# Altium PCB lvSdbPcb.PcbDoc (part 2 of 2)
Units mm, origin at the board's own origin, x right, y up, seen from the top; angles counter-clockwise.
Board outline 45 x 70 mm, 2 copper layers (Top Layer, Bottom Layer); 60 components, 41 nets, 179 pads, 30 vias.
Unrouted connection lines stored in the file: 1.
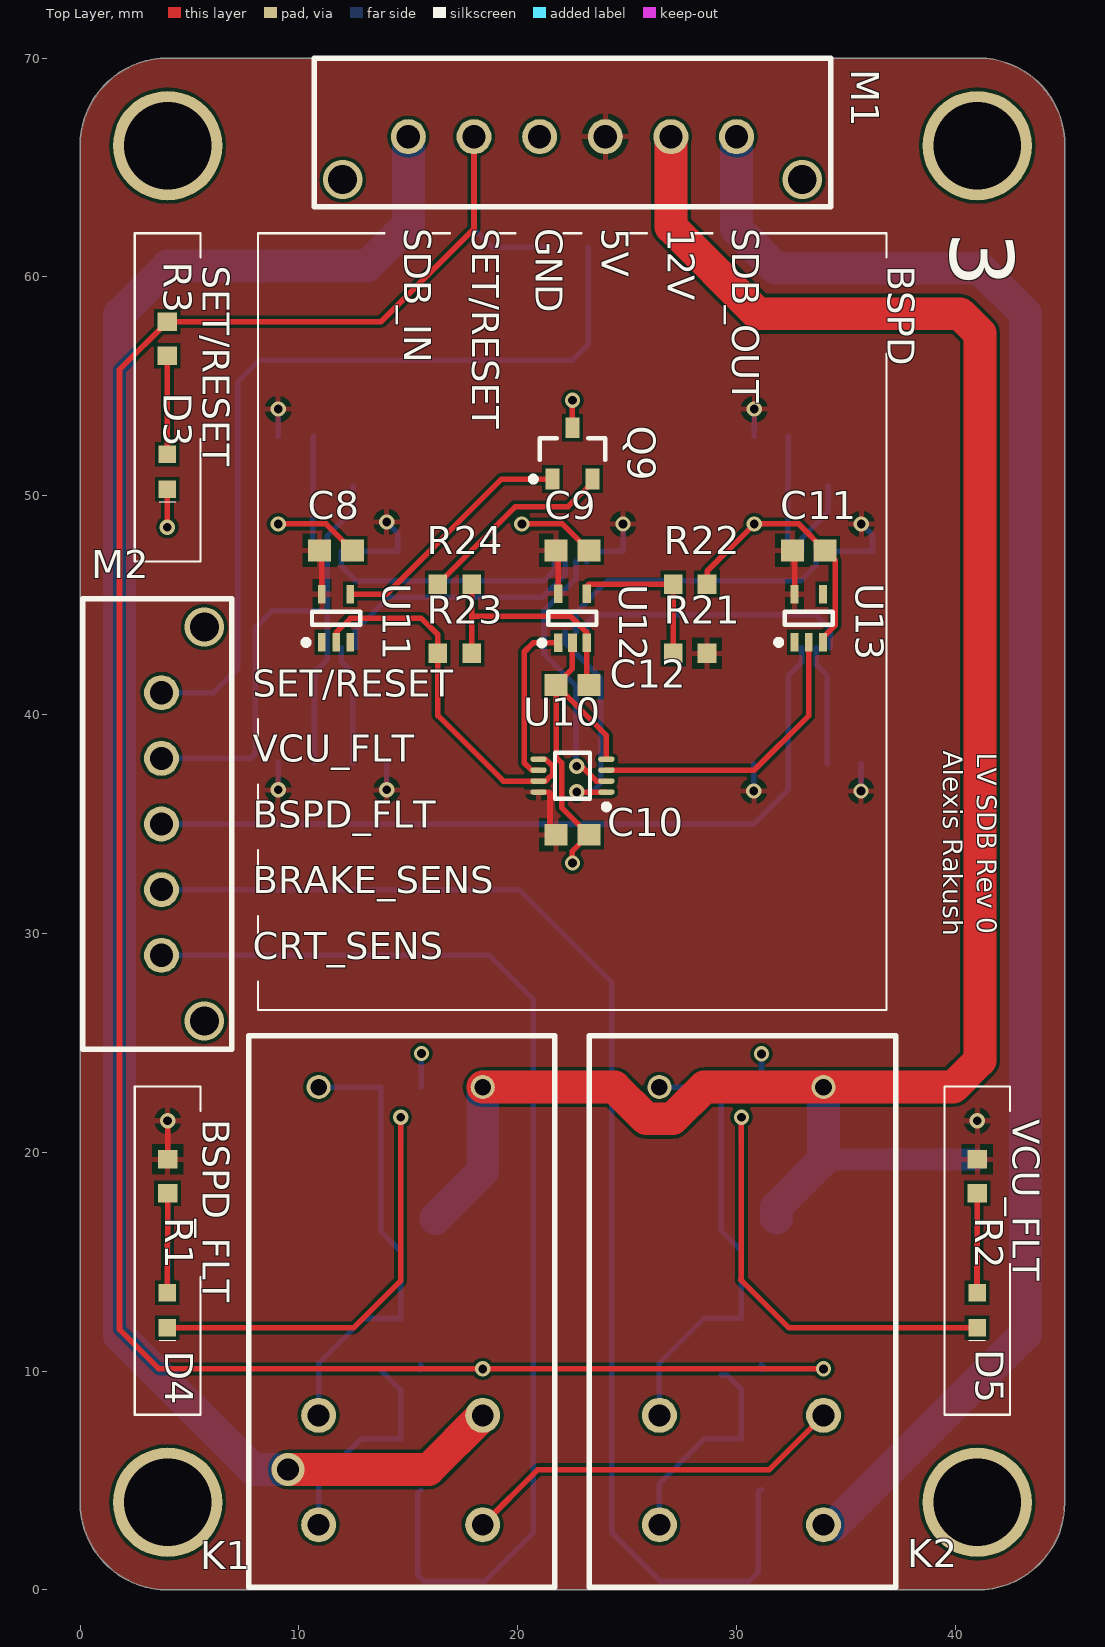
[diagram p0: Top Layer view]

## Via types
v1: diameter 0.7, hole 0.4, Top Layer to Bottom Layer, 25 vias
v2: diameter 1.8, hole 1.32, Top Layer to Bottom Layer, 4 vias
v3: diameter 1.5, hole 1, Top Layer to Bottom Layer, 1 vias

## Nets (pads, with @x,y where several pads share a name; then routed paths per layer and width w, separated by ;. In a path a pad name is that pad's centre, name@x,y a point inside that pad or via, vN(x,y) a via of type N, cw(c..) or ccw(c..) an arc to the next point about the centre after c; other vN are vias at no path point) (continued)
NetU9_2: (continued)
  Bottom Layer w0.254: U9.2 22.661,44.671 24.111,46.121 32.946,46.121 33.636,46.811 U14.7
NetU9_3: U9.3 U10.1 | length 10.2
  Top Layer w0.254: v1@22.8,36.461 U10.1
  Bottom Layer w0.254: U9.3 22.161,43.289 23.8,41.65 23.8,36.871 23.396,36.467 v1@22.6,36.467
  other v1: 22.7,36.467
NetU9_7: U9.7 U10.2 | length 12.2
  Top Layer w0.254: v1@22.661,37.64 v1(22.7,37.64) 22.91,37.64 23.589,36.961 U10.2
  Bottom Layer w0.254: v1@22.661,37.64 22.661,41.309 21.2,42.769 21.2,44.761 22.661,46.222 U9.7
NetU10_3: U10.3 U13.2 | length 13.6
  Top Layer w0.254: U10.3 30.807,37.461 33.3,39.954 U13.2
NetU10_6: U10.6 U12.1 | length 7.6
  Top Layer w0.254: U10.6 20.631,37.461 20.298,37.794 20.298,42.873 20.7,43.275 U12.1
NetU13_4: U13.4
SDB_IN: K1.5 M1.1 | length 85.8
  Top Layer w1.5: v3(9.5,5.5) 15.923,5.5 K1.5
  Bottom Layer w1.5: v3(9.5,5.5) 7.918,5.5 1.8,11.618 1.8,11.975 1.8,58.3 4,60.5 13.114,60.5 15,62.386 M1.1
SDB_OUT: K2.4 M1.6 | length 78.5
  Bottom Layer w1.5: M1.6 30,62.186 31.786,60.4 41.118,60.4 43.2,58.318 43.2,11.7 34.477,2.977 K2.4
SET/RESET: M1.2 Q4.1 Q5.1 R3.1 R9.2 | length 114
  Top Layer w0.254: M1.2 18,62.2 13.75,57.95 R3.1 1.8,55.762 1.8,11.9 3.6,10.1 v1(18.4,10.1) v1(33.973,10.1) v1@34,10.1
  Bottom Layer w0.254: Q4.1 15.565,10.285 15.75,10.1 v1(18.4,10.1) ; M1.2 18,62.186 18.821,61.365 R9.2@21.275,61.365 ; Q5.1 31.138,10.285 31.323,10.1 v1(33.973,10.1) v1@34,10.1
V_LOGIC: R23.1 U10.5 U10.7 U11.2 | length 16.7
  Top Layer w0.254: 11.7,43.75 12.35,44.4 15.6,44.4 16.35,43.65 R23.1 16.35,39.954 19.343,36.961 U10.7 21.272,36.961 21.367,37.055 21.367,37.059 21.602,37.294 21.602,37.627 21.269,37.961 U10.5
VCU_FLT: M2.2 Q8.1 R5.2 | length 59.1
  Bottom Layer w0.254: M2.2 20.061,32 24.3,27.761 24.3,2.6 26.5,0.4 30.583,0.4 30.985,0.802 R5.2 30.985,4.485 31.066,4.566 Q8.1
pads on no net: U11.1 U11.3 U13.1
copper on no net:
  other v2: 5.678,26 5.678,44 12,64.45 33,64.45

## Polygon pours and split planes (outlines as drawn)
no net on Bottom Layer (solid, pour order 12): 38,14.738
GND on Bottom Layer "Bottom Layer-GND" (solid, pour order 6): 41,0 ccw(c41,4) 45,4 45,66.1 ccw(c41.1,66.1) 41.1,70 4,70 ccw(c4,66) 0,66 0,4 ccw(c4,4) 4,0
5V on Top Layer "Top Layer-5V" (solid, pour order 10): 41,0 ccw(c41,4) 45,4 45,66.1 ccw(c41.1,66.1) 41.1,70 4,70 ccw(c4,66) 0,66 0,4 ccw(c4,4) 4,0

## Silkscreen, mask and mechanical layers (free items; w line width, h text height)
Top Overlay:
  lines w0.1: 5.5,14.3 5.5,12.5 5.5,8 2.5,8 2.5,23 5.5,23 5.5,22.5 5.5,21.9 ; 5.5,52.6 5.5,51.5 5.5,47 2.5,47 2.5,62 5.5,62 5.5,61.5 5.5,60.9 ; 8.128,27.8 8.128,26.5 36.845,26.5 36.845,56.145 36.845,56.5 ; 8.128,30 8.128,30.8 ; 8.128,33 8.128,33.8 ; 8.128,36 8.128,36.8 ; 8.128,39 8.128,39.8 ; 8.128,42 8.128,62 13.9,62 ; 16.1,62 16.9,62 ; 19.1,62 19.9,62 ; 22.1,62 22.9,62 ; 25.1,62 25.9,62 ; 28.1,62 28.9,62 ; 31.1,62 36.845,62 ; 36.845,60.9 36.845,61.955 ; 42.5,14.9 42.5,13.3 42.5,8 39.5,8 39.5,23 42.5,23 42.5,22.5 42.5,21.9
  text "SDB_IN" at 14.4,62.228 h2.1 r270
  text "SET/RESET" at 17.498,62.228 h2.1 r270
  text "GND" at 20.413,62.228 h2.1 r270
  text "5V" at 23.426,62.228 h2.1 r270
  text "12V" at 26.439,62.228 h2.1 r270
  text "SDB_OUT" at 29.4,62.228 h2.1 r270
  text "3" at 38.8,62.055 h5 r270
  text "SET/RESET" at 5.2,60.5 h2.1 r270
  text "BSPD" at 36.5,60.5 h2.1 r270
  text "SET/RESET" at 7.9,40.4 h2.1
  text "Alexis Rakush" at 39.139,38.355 h1.5 r270
  text "LV SDB Rev 0" at 40.7,38.255 h1.5 r270
  text "VCU_FLT" at 7.9,37.439 h2.1
  text "BSPD_FLT" at 7.9,34.426 h2.1
  text "BRAKE_SENS" at 7.9,31.413 h2.1
  text "CRT_SENS" at 7.9,28.4 h2.1
  text "BSPD_FLT" at 5.2,21.5 h2.1 r270
  text "VCU_FLT" at 42.2,21.5 h2.1 r270
Bottom Overlay:
  lines w0.1: 2.5,13.7 2.5,8.4 2.5,8 5.5,8 5.5,23 2.5,23 2.5,22.4 2.5,21.9 ; 10.8,26.5 6.928,26.5 6.928,0 38,0 38,26.5 33.664,26.5 ; 18.592,26.5 22.464,26.5 ; 22.464,0 22.464,26.5 ; 26.8,26.5 22.464,26.5 ; 39.5,12.9 39.5,8.4 39.5,8 42.5,8 42.5,23 39.5,23 39.5,22.4 39.5,21.9
  text "BSPD_FLT" at 18.1,26 h2.2
  text "VCU_FLT" at 33.398,26 h2.2
  text "5V POWER" at 2.9,21.6 h2.1 r90
  text "12V POWER" at 39.9,21.6 h2.1 r90
sillyBoard:
  lines w0.254: 0,4 ccw(c4,4) 4,0 41,0 ccw(c41,4) 45,4 45,66 ccw(c41,66) 41,70 4,70 ccw(c4,66) 0,66 0,4